# EAGLE board MotorController (EAGLE 9.6.1)
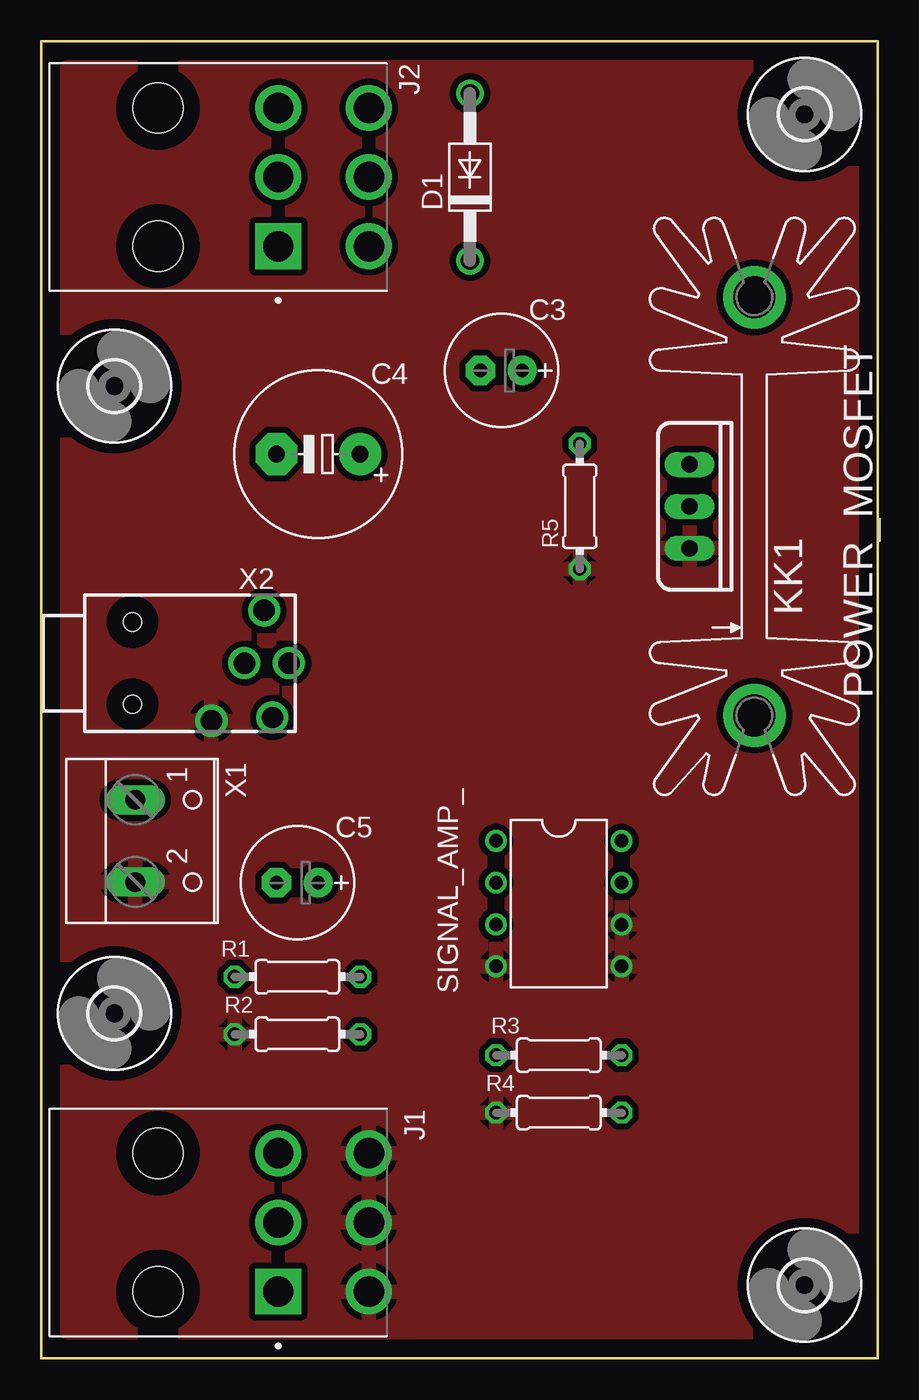
[diagram p0: board, top side]
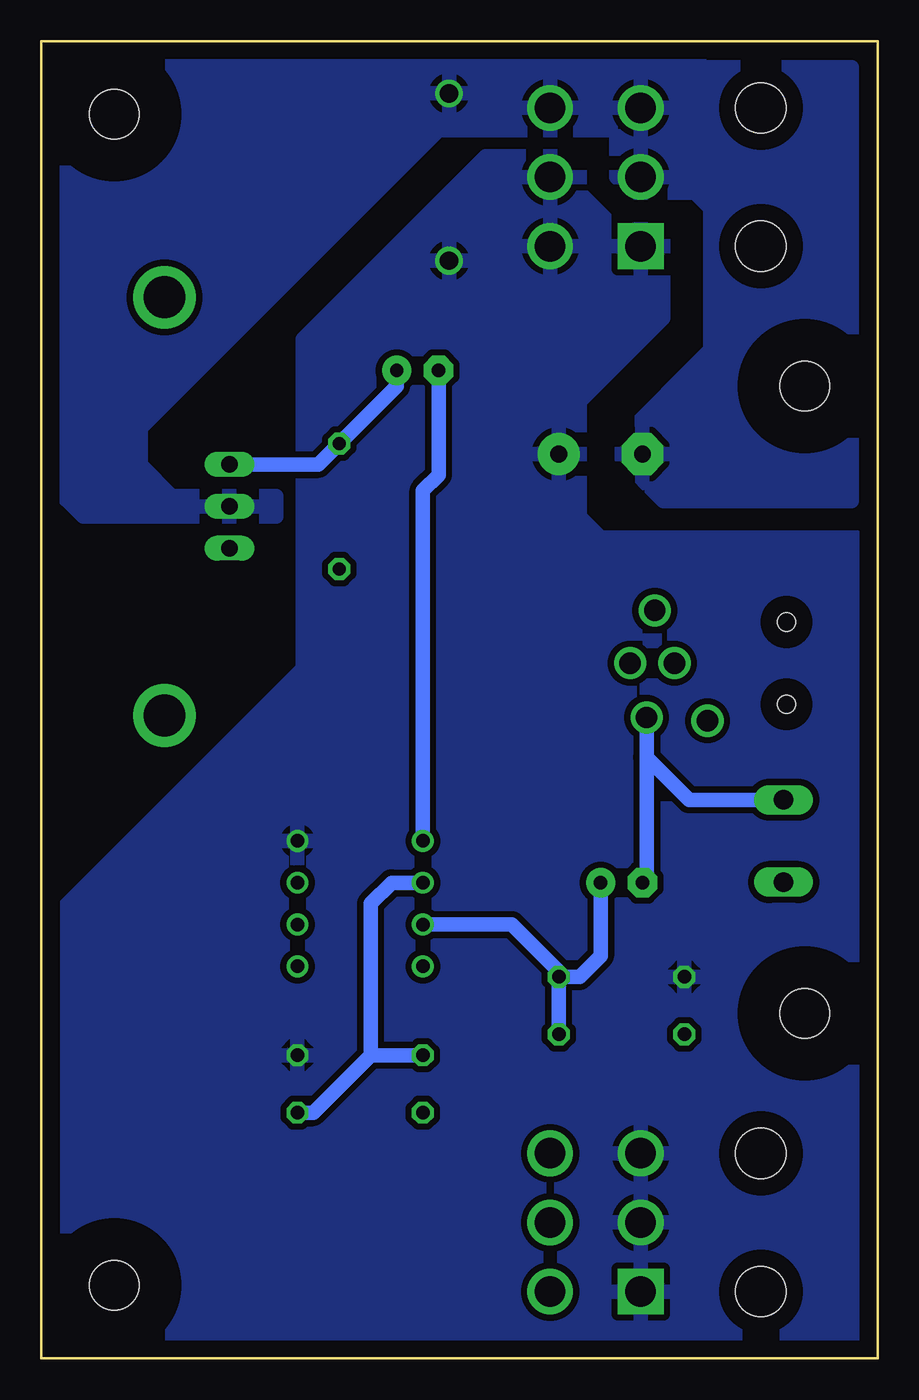
[diagram p1: board, bottom side, seen from below]

Size 50.8 x 80.01 mm. Coordinates in mm from the lower left corner, seen from the top.
Outline: 0,0 0,80.01 50.8,80.01 50.8,0 0,0
Copper layers (1*16): Top 0.035mm / dielectric 1.5mm / Bottom 0.035mm
Design rules "default *": minimum track width 15mil, minimum drill 0.35mm, track to track 15mil, track to pad 15mil, pad to pad 15mil, via to via 15mil, smd to smd 15mil, copper to edge 40mil, drill to drill 6mil, minimum pad ring 10mil, minimum via ring 8mil, stop-mask expansion 4mil, vias tented up to drill 0mil, thermal gap 15mil
Net classes: 1 Power: width 1.27 mm; 2 Signal: width 0.889 mm

## Footprints (pad centres in the part's own frame; a part is rotated, then mirrored left to right if it is on the bottom)
E2,5-7 = drill 0.813 pad 1.778: + -1.27,0 | drill 0.813 pad 1.778 octagon: - 1.27,0
E5-10,5 = drill 1.016 pad 2.54: + -2.54,0 | drill 1.016 pad 2.54 octagon: - 2.54,0
DO41-10 = drill 1.118: A 5.08,0; C -5.08,0
3,0 = hole 3: 0,0
MOLEX_39-30-1060 = drill 1.85 square: 1 4.2,-2.75 | drill 1.85: 2 0,-2.75; 3 -4.2,-2.75; 4 4.2,2.75; 5 0,2.75; 6 -4.2,2.75 | hole 3.05: -4.2,-10.05; 4.2,-10.05
SK104-PAD = drill 2.54 pad 3.81: K1 -12.7,-0.762; K2 12.7,-0.762
TO-220 = drill 1 long: 1 -2.54,0; 2 0,0; 3 2.54,0
0204/7 = drill 0.813 octagon: 1 -3.81,0; 2 3.81,0
DIL08 = drill 0.813 pad 1.27: 1 -3.81,-3.81; 2 -1.27,-3.81; 3 1.27,-3.81; 4 3.81,-3.81; 5 3.81,3.81; 6 1.27,3.81; 7 -1.27,3.81; 8 -3.81,3.81
W237-102 = drill 1.194 long: 1 -2.5,-1.27; 2 2.5,-1.27
1503_10 = drill 1.3 pad 1.9: 1 -3.5,-7.8; 2 0,-9.8; 3 -3.3,-11.5; 4 3.2,-11; 5 0,-12.5 | hole 1.1: -2.5,-3; 2.5,-3

## Placement (x,y rotation side)
C3  1uF  [E2,5-7]  27.94,60.01 180 top
C4  660uF  [E5-10,5]  16.83,54.93 180 top
C5  1uF  [E2,5-7]  15.56,28.89 180 top
D1  1N4004  [DO41-10]  26.04,71.75 90 top
H1  MOUNT-HOLE3.0  [3,0]  46.35,4.45 0 top
H2  MOUNT-HOLE3.0  [3,0]  46.35,75.56 0 top
H3  MOUNT-HOLE3.0  [3,0]  4.45,59.05 0 top
H4  MOUNT-HOLE3.0  [3,0]  4.45,20.95 0 top
J1  39-30-1060  [MOLEX_39-30-1060]  17.14,8.26 270 top
J2  39-30-1060  [MOLEX_39-30-1060]  17.14,71.75 270 top
KK1  SK104-PAD  [SK104-PAD]  42.55,51.75 90 top
POWER_MOSFET  IRFZ44N  [TO-220]  39.37,51.75 270 top
R1  10k  [0204/7]  15.56,23.18 180 top
R2  10k  [0204/7]  15.56,19.68 0 top
R3  10k  [0204/7]  31.43,18.41 0 top
R4  10k  [0204/7]  31.43,14.92 0 top
R5  10k  [0204/7]  32.7,51.75 90 top
SIGNAL_AMP_  LM358N  [DIL08]  31.43,27.62 270 top
X1  [W237-102]  6.99,31.43 270 top
X2  1503_10  [1503_10]  2.54,42.23 90 top

## Library data of the parts
C3-C5 = adafruit
D1 = diode
H1-H4 = holes
J1 J2 = 39-30-1060; AVAILABILITY: Unavailable; DESCRIPTION: Connector Header Through Hole, Right Angle 6 position 0.165 _4.20mm_; MF: Molex; MP: 39-30-1060; PACKAGE: None; PRICE: None
KK1 = heatsink
POWER_MOSFET = IRFZ44N; AVAILABILITY: Unavailable; DESCRIPTION: N-Channel 55V 49A _Tc_ 3.8W _Ta_, 94W _Tc_ Surface Mount D2PAK; MF: Infineon Technologies; MP: IRFZ44N; PACKAGE: D2PAK NXP Semiconductors; PRICE: None
R1-R5 = rcl; SPICEPREFIX: R
SIGNAL_AMP_ = linear
X1 = con-wago-500; MPN: 237-102; OC_FARNELL: unknown; OC_NEWARK: 70K9898
X2 = con-lumberg; OC_FARNELL: 1308868; OC_NEWARK: unknown

## Nets
GND [Power]: J1.4 J1.5 J1.6 POWER_MOSFET.3 R2.1 R4.1 R5.1 SIGNAL_AMP_.4 SIGNAL_AMP_.5 SIGNAL_AMP_.6 X1.2 X2.1
MOTORCOM [Power]: C4.- D1.A J2.2 J2.3 J2.6 POWER_MOSFET.2
N$1 [Signal]: C5.+ R1.1 R2.2 SIGNAL_AMP_.3
N$2 [Signal]: R3.1 R4.2 SIGNAL_AMP_.2
N$3 [Signal]: C3.- SIGNAL_AMP_.1
N$4 [Signal]: C3.+ POWER_MOSFET.1 R5.2
N$7 [Signal]: C5.- X1.1 X2.3
VCC [Power]: C4.+ D1.C J1.1 J1.2 J1.3 J2.1 J2.4 J2.5 R1.2 R3.2 SIGNAL_AMP_.8

## Tracks (layer width: path | path; a pad name or v marks a point on that pad's centre or on a via)
GND
  pour Top: 1.59,78.42 49.21,78.42 49.21,1.59 1.59,1.59
MOTORCOM
  pour Bottom: 36.51,52.39 42.86,52.39 44.77,54.29 44.77,56.52 26.67,74.61 11.75,74.61 10.79,75.56 10.79,78.74 11.43,79.38 47.62,79.38 50.16,76.83 50.16,53.02 48.26,51.12 36.51,51.12
  pour Bottom: 15.88,78.42 1.59,78.42 1.59,52.07 13.02,52.07 15.56,54.61 15.56,55.88 10.16,61.28 10.16,69.85 11.11,70.8 14.92,70.8 15.88,71.75
N$1
  Bottom 0.889: C5.+ 16.83,24.45 18.1,23.18 R1.1 | R2.2 R1.1 | SIGNAL_AMP_.3 22.23,26.35 19.37,23.5 R1.1
N$2
  Bottom 0.889: R4.2 34.29,14.92 30.8,18.41 | R3.1 30.8,18.41 | 30.8,18.41 30.8,27.62 29.53,28.89 SIGNAL_AMP_.2
N$3
  Bottom 0.889: SIGNAL_AMP_.1 27.62,52.7 26.67,53.66 C3.-
N$4
  Bottom 0.889: POWER_MOSFET.1 33.97,54.29 R5.2 29.21,59.05 C3.+
N$7
  Bottom 0.889: X2.3 14.04,36.51 | 14.04,36.51 14.04,29.14 C5.- | X1.1 11.46,33.93 14.04,36.51
VCC
  pour Bottom: 1.27,49.85 16.83,49.85 18.1,51.12 18.1,72.07 19.05,73.03 23.81,73.03 34.92,61.91 34.92,41.91 49.53,27.3 49.53,1.27 1.27,1.27
  pour Bottom: 18.1,72.07 18.1,70.8 15.88,68.58 13.65,68.58 13.02,67.94 13.02,63.18 19.37,56.83 19.68,57.15 19.68,73.03 19.05,73.03